# Altium PCB leo_pcb.PcbDoc (part 1 of 2)
Units mm, origin at the board's own origin, x right, y up, seen from the top; angles counter-clockwise.
Board outline 72.5 x 82 mm, 4 copper layers (TOP_Layer, INT1_GND, INT2_GND, BOTTOM_Layer), stack 1.586 mm thick; 90 components, 77 nets, 351 pads, 145 vias.
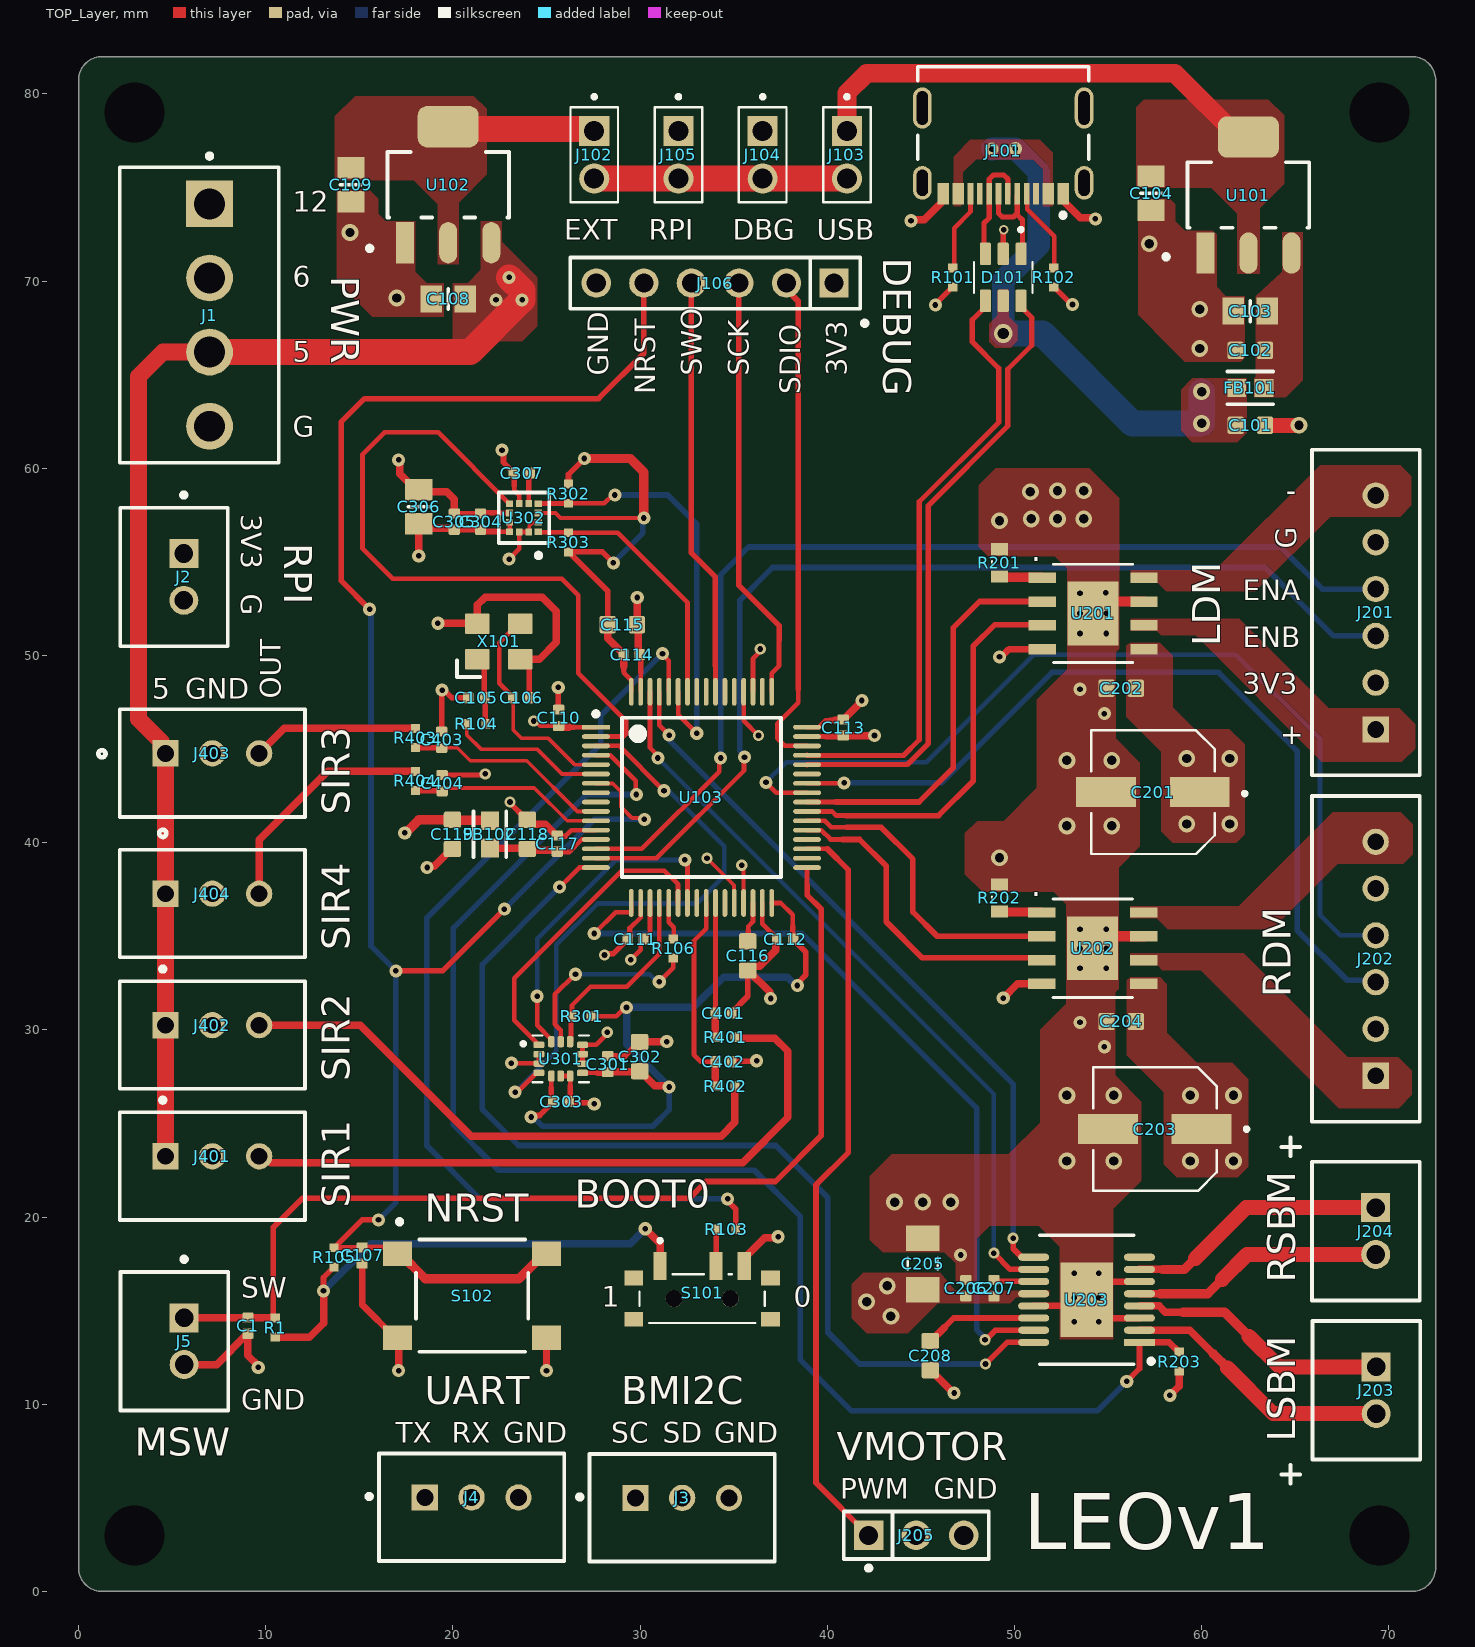
[diagram p0: TOP_Layer view]
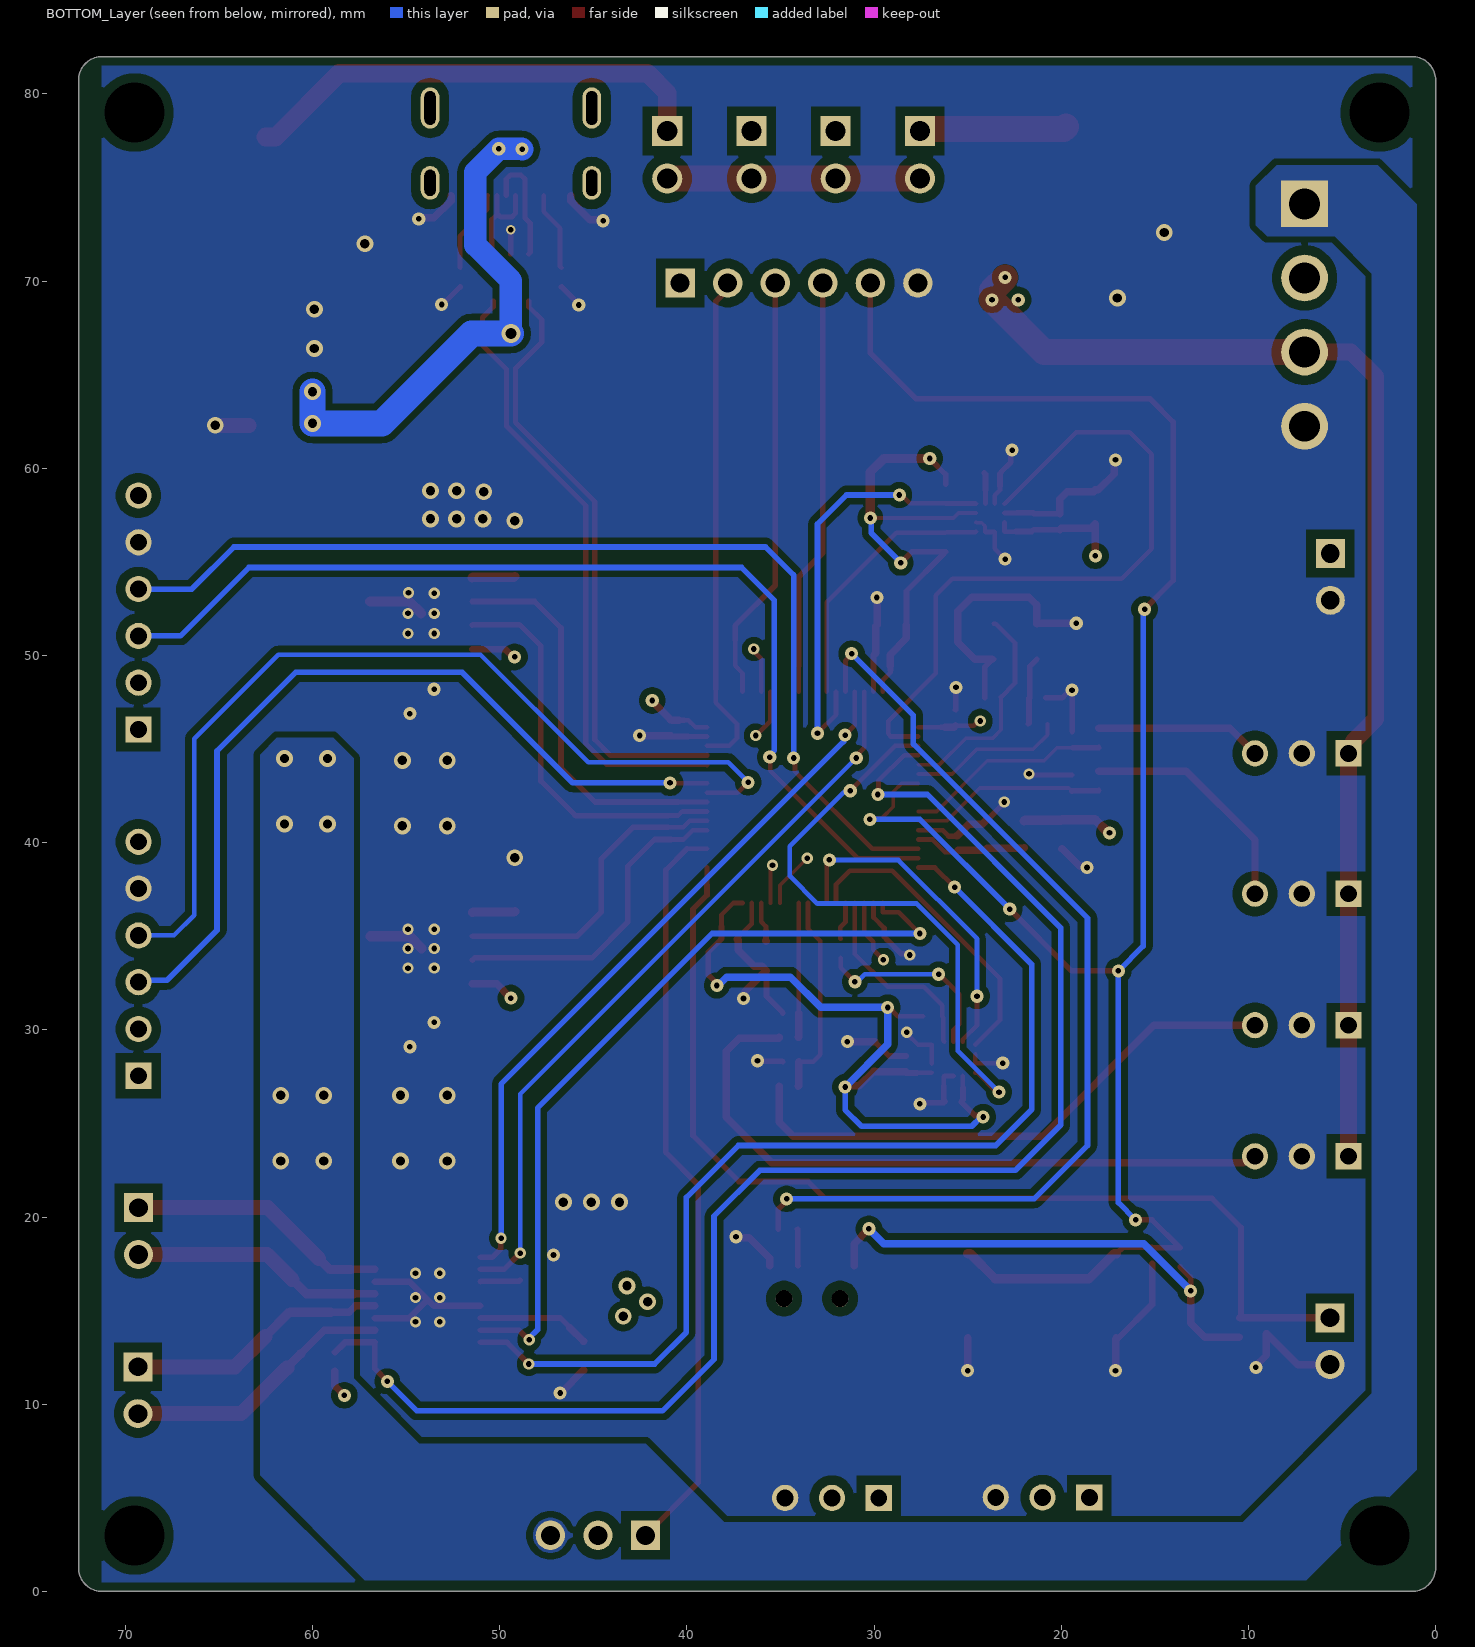
[diagram p1: BOTTOM_Layer view, seen from below]
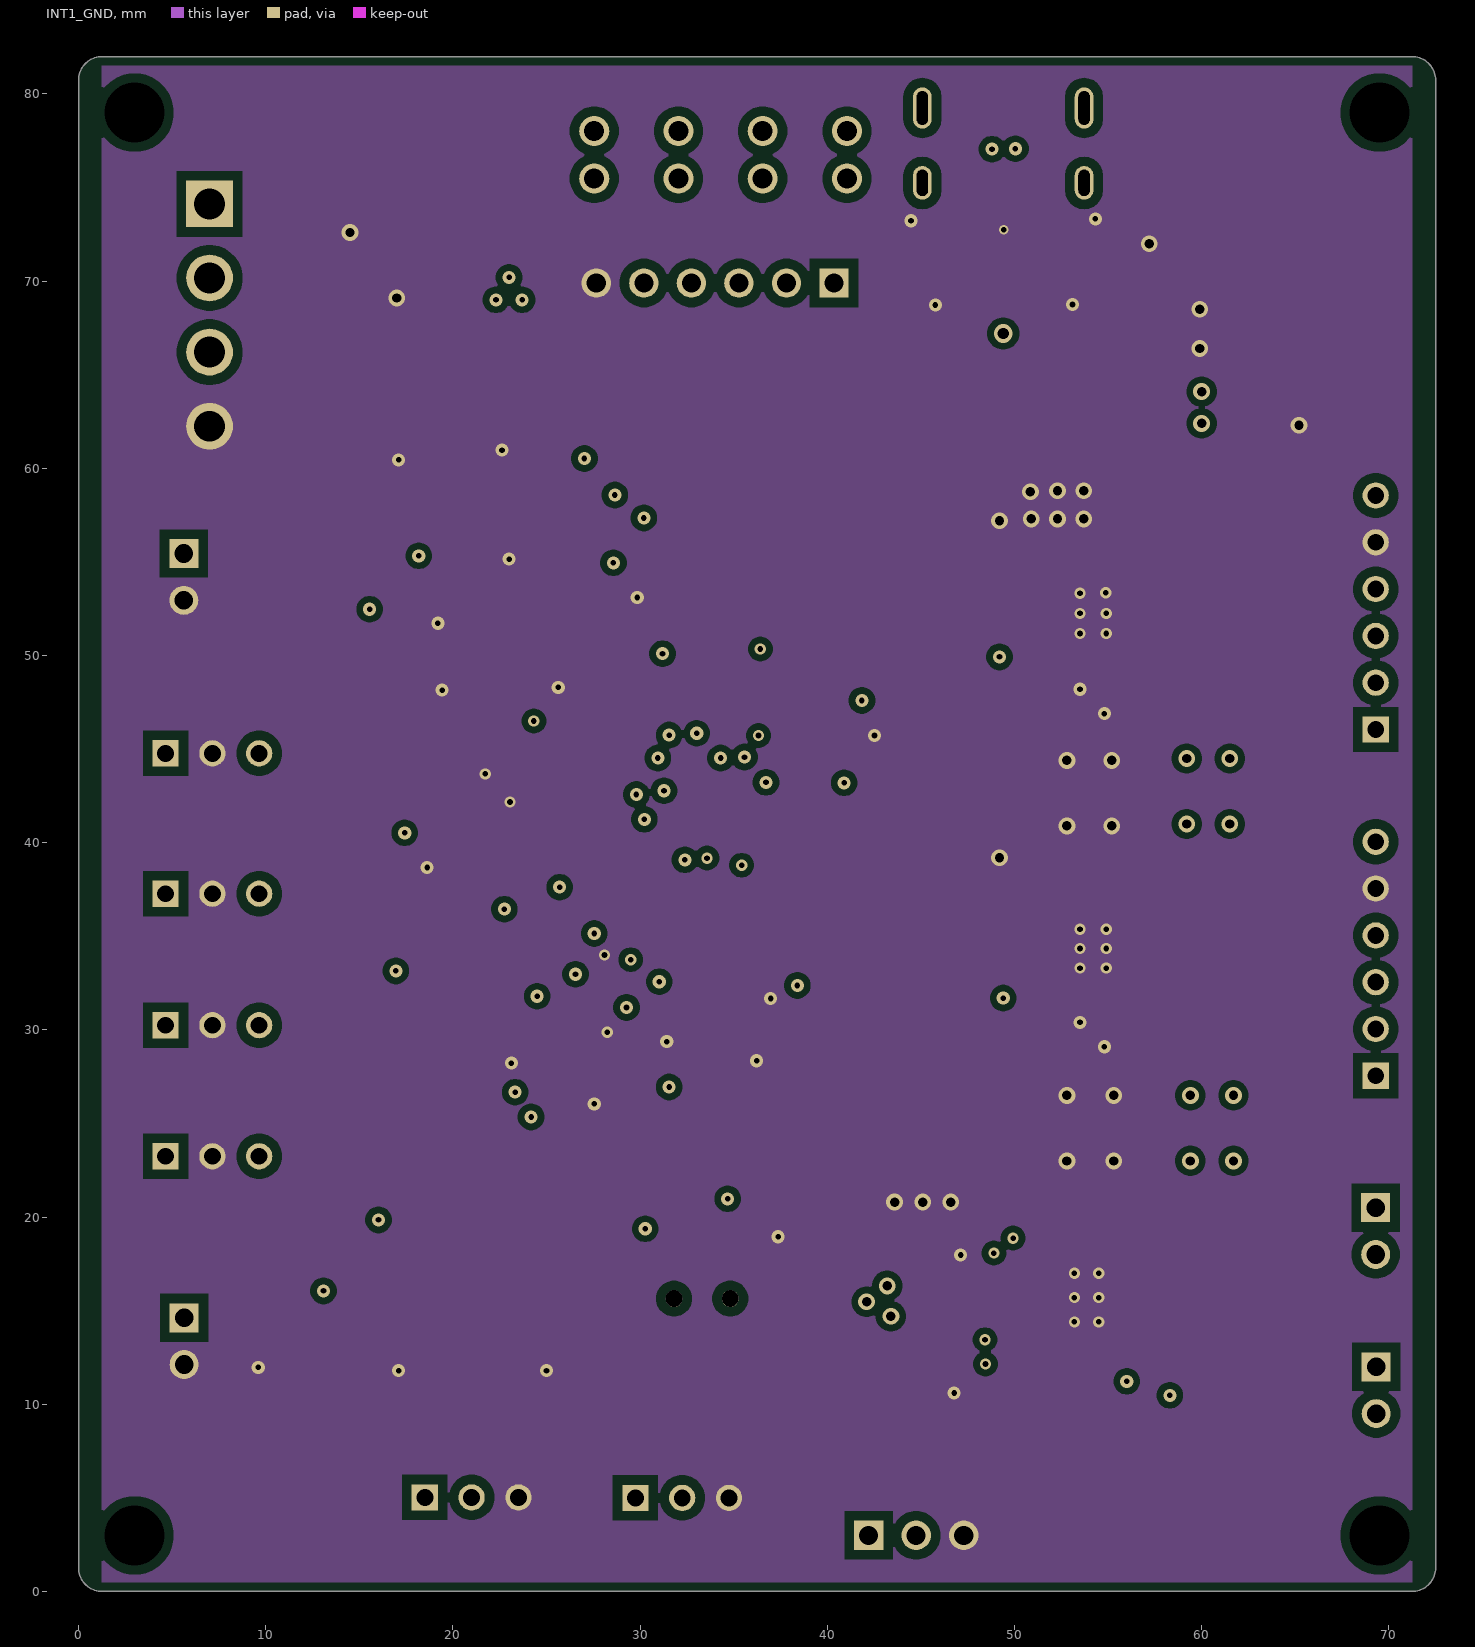
[diagram p2: INT1_GND]
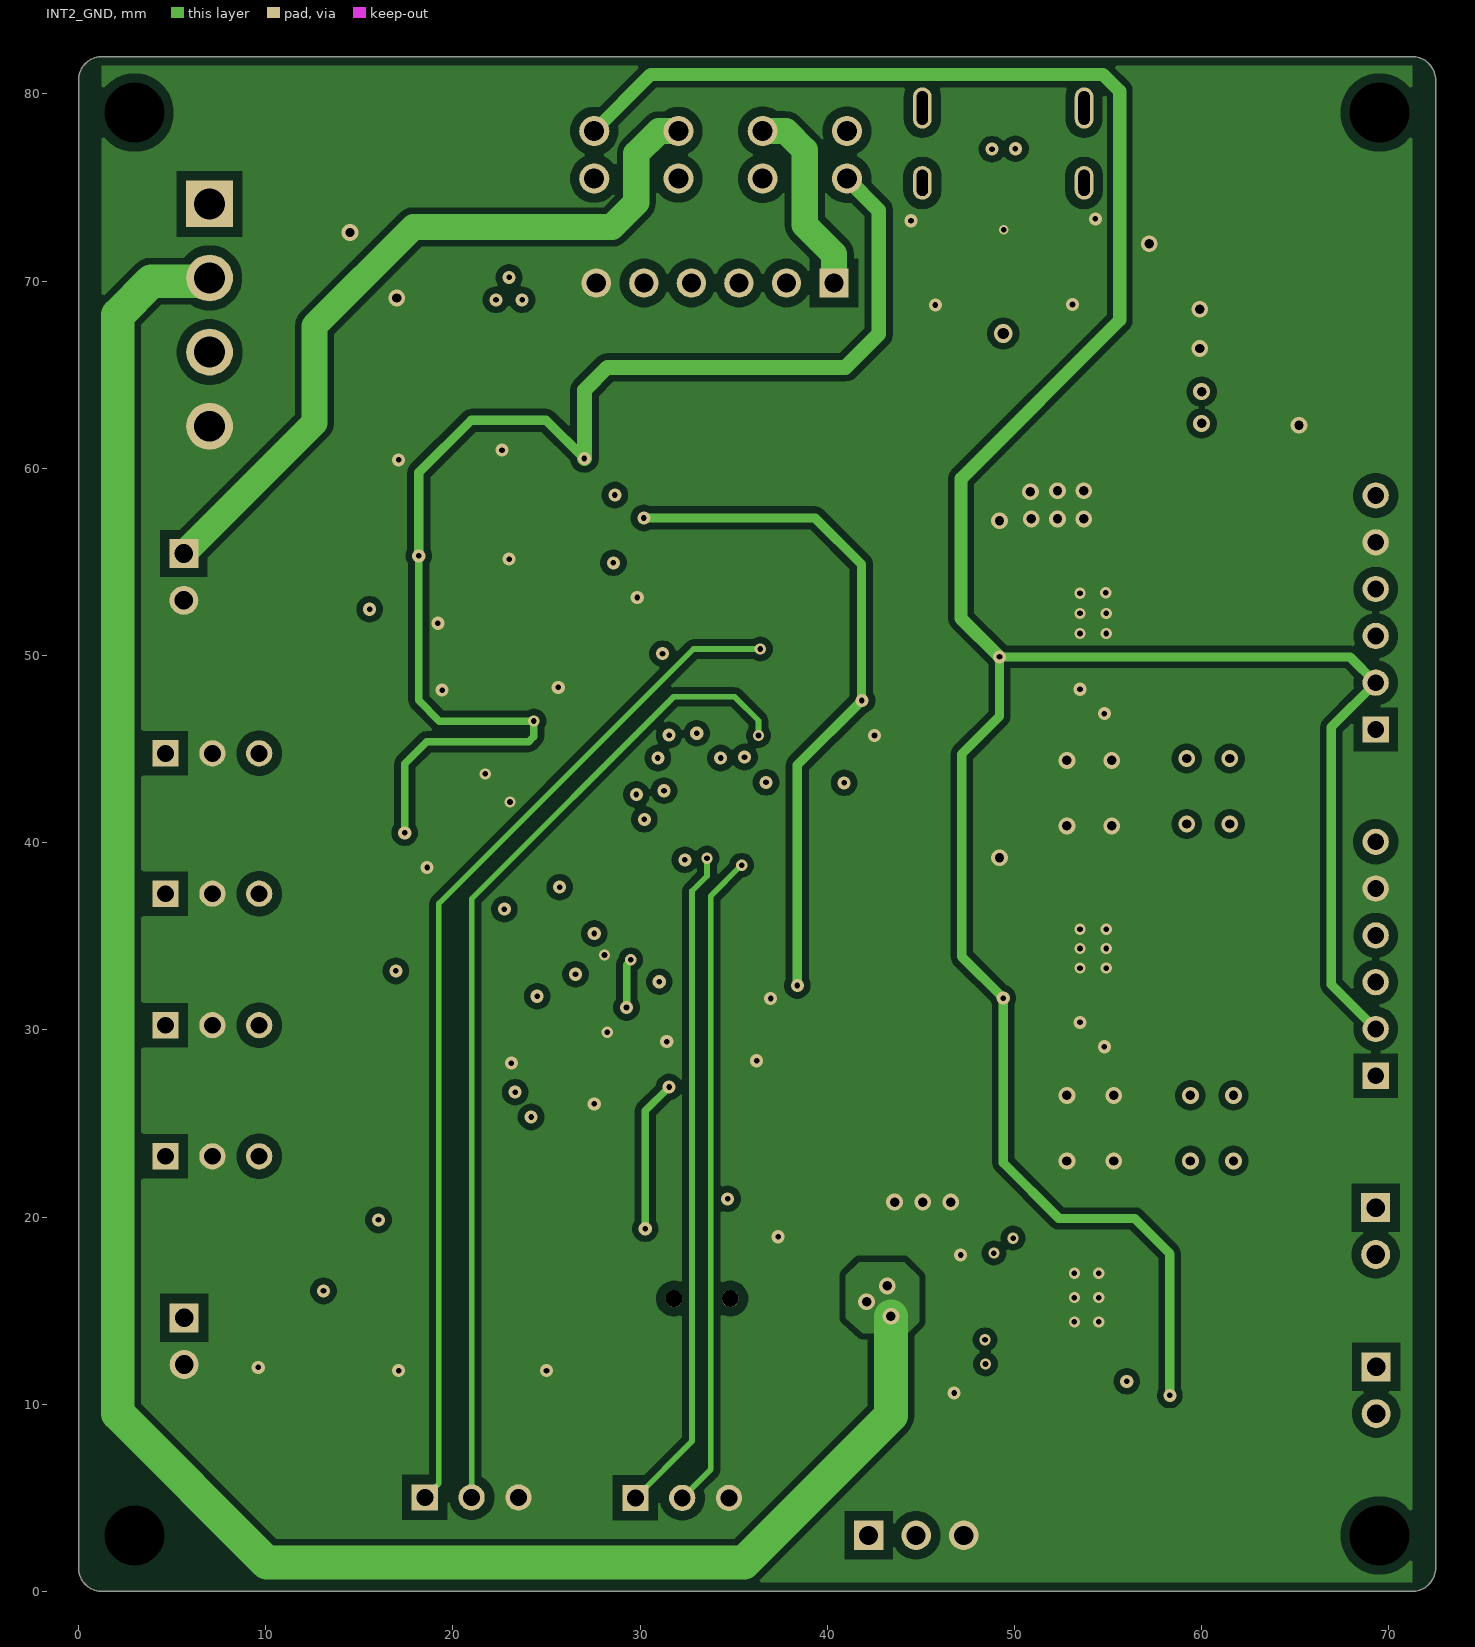
[diagram p3: INT2_GND]
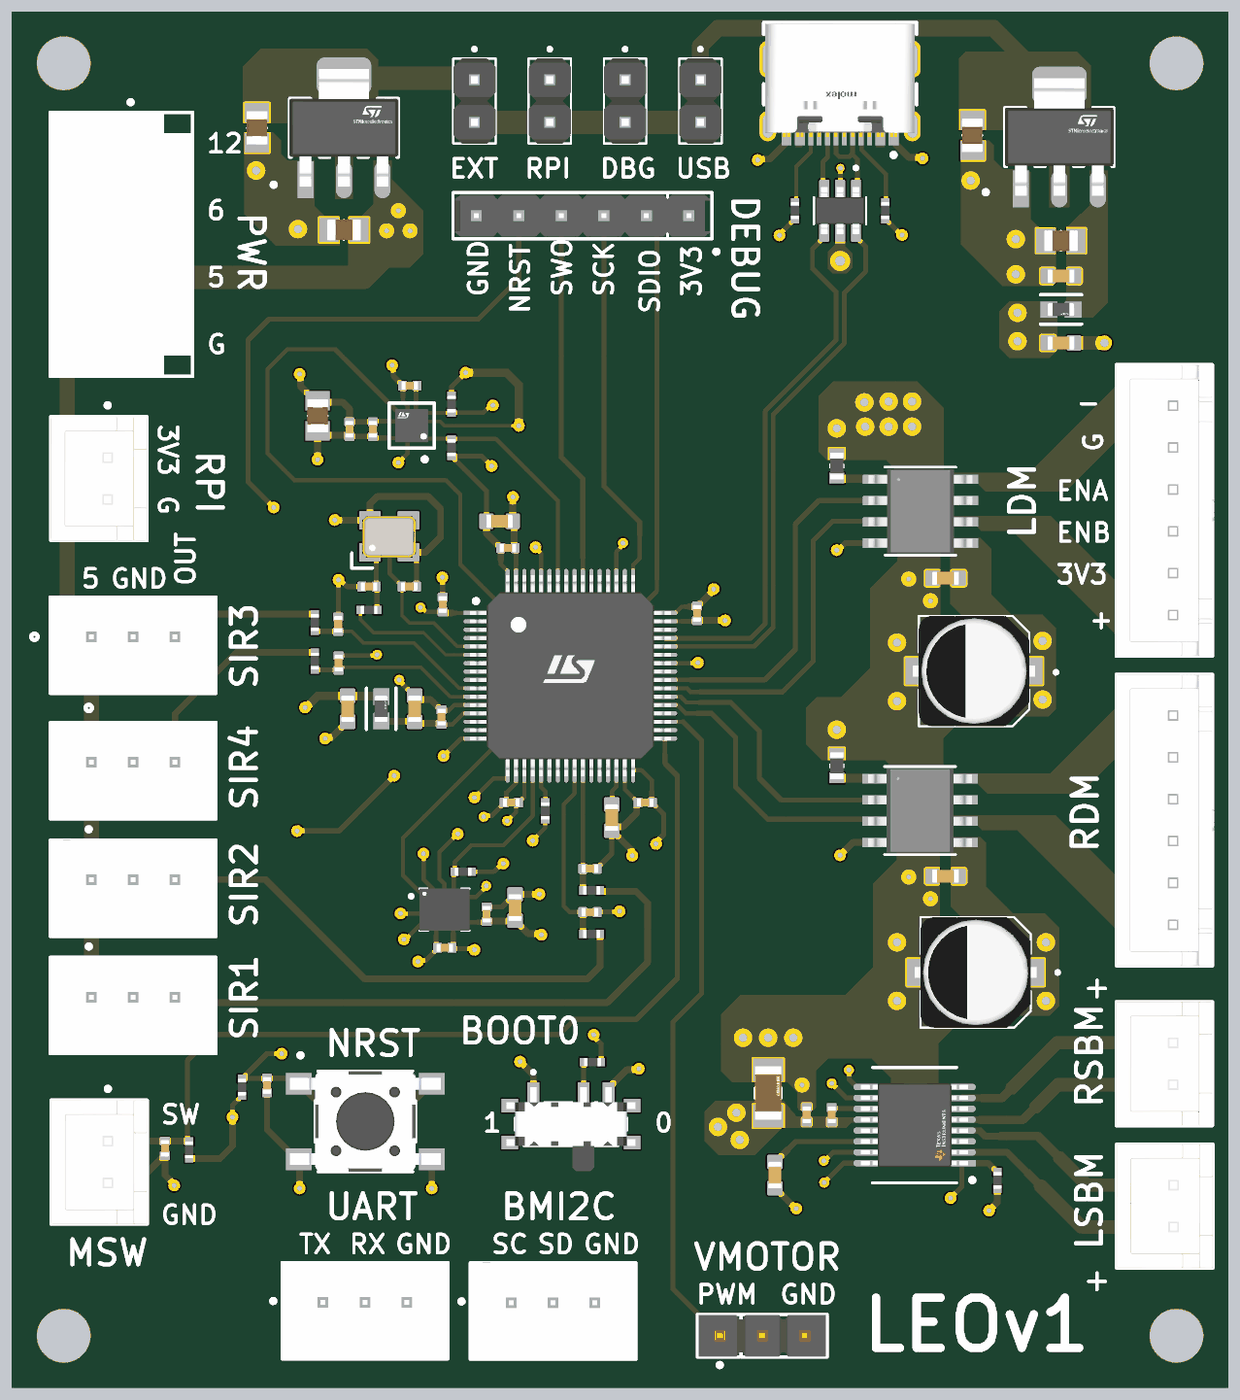
[diagram p5: 3D render of the assembled board from above, using the file's embedded part models]

## Layer stack, top to bottom
Top Solder: solder mask 0.0254, SM-001, Dk 4
TOP_Layer: signal copper 0.035
Dielectric 1: prepreg 0.2104, PP-017, Dk 4.4
INT1_GND: signal copper 0.0152
Dielectric 3: core 1.065, Core-039, Dk 4.6
INT2_GND: signal copper 0.0152
Dielectric 5: prepreg 0.2104, PP-017, Dk 4.4
BOTTOM_Layer: signal copper 0.035
Bottom Solder: solder mask 0.0254, SM-001, Dk 4

## Board outline
1.27,0 cw(c1.27,1.27) 0,1.27 0,80.73 cw(c1.27,80.73) 1.27,82 71.23,82 cw(c71.23,80.73) 72.5,80.73 72.5,1.27 cw(c71.23,1.27) 71.23,0

## Design rules (kind name [scope] priority, off if disabled: settings)
Clearance [All] p1: gap=0.2 ignorepadtopadclearanceinfootprint=FALSE except(0: Arc-Hole Track-Hole SMDPad-Hole THPad-Hole Via-Hole Fill-Hole Poly-Hole Region-Hole Text-Hole; 0.15: SMDPad-SMDPad; 0.25: SMDPad-Via SMDPad-Fill SMDPad-Poly SMDPad-Region; 0.3: SMDPad-THPad THPad-Via; 0.35: Arc-Fill Arc-Poly Arc-Region Track-Fill Track-Poly Track-Region Via-Fill Via-Poly Via-Region Fill-Fill Fill-Poly Fill-Region Poly-Poly Poly-Region Region-Region; 0.5: THPad-THPad THPad-Fill THPad-Poly THPad-Region)
DiffPairsRouting [All] p1: maxlimit=0.254 minlimit=0.203 mostfreqgap=0.254 toplayer_maxgap=0.203 toplayer_prefgap=0.203 toplayer_minwidth=0.281 toplayer_maxwidth=0.281 toplayer_prefwidth=0.281 bottomlayer_maxgap=0.203 bottomlayer_prefgap=0.203 bottomlayer_minwidth=0.281 bottomlayer_maxwidth=0.281 bottomlayer_prefwidth=0.281 impedanceprofiledriven=TRUE impedanceprofileid={2BA723BC-F0D8-4CC2-BE59-BD9791331554} impedanceprofilevalue=90.000000 maxuncoupledlength=12.7
HoleSize [All] p1: absolutevalues=TRUE maxlimit=6.3 minlimit=0.15 maxpercent=80.000 minpercent=20.000
HoleToHoleClearance [All] p1: gap=0.2 allowstackedmicrovias=TRUE
MinimumSolderMaskSliver [All] p1: minsoldermaskwidth=0.13
PlaneClearance [All] p1: clearance=0.5
PolygonConnect [All] p1: connectstyle=Direct reliefconductorwidth=0.254 reliefentries=4 polygonreliefangle="90 Angle" airgapwidth=0.254
RoutingVias [All] p1: holewidth=0.3 width=0.7 viastyle="Through Hole" minholewidth=0.2 minwidth=0.25 maxholewidth=0.7 maxwidth=1.5
SilkToSilkClearance [All] p1: silktosilkclearance=0.25
SilkToSolderMaskClearance [IsPad] p1: minsilkscreentomaskgap=0.2 clearancetoexposedcopper=TRUE
SolderMaskExpansion [All] p1: expansion=0.1 istentingtop=FALSE
UnRoutedNet [All] p1: checkbadconnections=TRUE
Width [All] p1: maxlimit=2 minlimit=0.2 preferedwidth=0.3 midlayer1_maxwidth=1 minimp=50.000000 maximp=50.000000 favimp=50.000000
22 further rules are at their usual default settings.

## Classes and differential pairs
net class SBM_PWM_INPUT[1..4]: SBM_PWM_INPUT1 SBM_PWM_INPUT2 SBM_PWM_INPUT3 SBM_PWM_INPUT4
differential pair class ESD_DIFF_USB: ESD_USB_D
differential pair class DIFF_USB: USB_D
differential pair USB_D: +USB_D_P -USB_D_N
differential pair ESD_USB_D: +ESD_USB_D_P -ESD_USB_D_N

## Components (designator, comment, footprint, x,y, rotation, side; value= is the part's Value field where it differs from the comment)
C1 "100n" CAP_0402 9.05,14.2 r90 top
C101 "2.2u" CAP_0603 62.6,62.3 r180 top
C102 "2.2u" CAP_0603 62.6,66.3 r0 top
C103 "10u" CAP_0805 62.6,68.4 r180 top
C104 "10u" CAP_0805 57.3,74.7 r270 top
C105 "8p" CAP_0402 21.25,47.75 r0 top
C106 "8p" CAP_0402 23.65,47.75 r180 top
C107 "100n" CAP_0402 15.15,17.95 r90 top
C108 "10u" CAP_0805 19.75,69.05 r180 top
C109 "10u" CAP_0805 14.55,75.15 r270 top
C110 "100n" CAP_0402 25.65,46.675 r270 top
C111 "100n" CAP_0402 29.75,34.85 r0 top
C112 "100n" CAP_0402 37.75,34.85 r0 top
C113 "100n" CAP_0402 40.85,46.15 r90 top
C114 "100n" CAP_0402 29.55,50.05 r180 top
C115 "4.7u" CAP_0603 29.05,51.65 r180 top
C116 "2.2u" CAP_0603 35.75,33.95 r90 top
C117 "100n" CAP_0402 25.575,39.95 r270 top
C118 "1u" CAP_0603 23.975,40.45 r270 top
C119 "1u" CAP_0603 19.975,40.45 r90 top
C201 "100u" CAP_EEHZA1E101XP 57.4,42.7 r180 top
C202 "100n" CAP_0603 55.7,48.25 r0 top
C203 "100u" CAP_EEHZA1E101XP 57.5,24.7 r180 top
C204 "100n" CAP_0603 55.7,30.45 r0 top
C205 "22u" CAP_1206 45.1,17.5 r90 top value=22uF
C206 "100n" CAP_0402 47.4,16.2 r270 top
C207 "10n" CAP_0402 48.9,16.2 r270 top
C208 "2.2u" CAP_0603 45.5,12.6 r90 top
C301 "100n" CAP_0402 28.275,28.175 r270 top
C302 "2.2u" CAP_0603 29.975,28.575 r270 top
C303 "10n" CAP_0402 25.775,26.175 r180 top
C304 "100n" CAP_0402 21.475,57.15 r270 top
C305 "100n" CAP_0402 20.075,57.15 r270 top
C306 "10u" CAP_0805 18.175,57.95 r90 top
C307 "220n" CAP_0402 23.675,59.75 r0 top
C401 "100n" CAP_0402 34.45,30.9 r180 top
C402 "100n" CAP_0402 34.45,28.3 r180 top
C403 "100n" CAP_0402 19.4,45.5 r270 top
C404 "100n" CAP_0402 19.425,43.182 r270 top
D101 "USBLC6-2SC6" SOT95P280X145-6N 49.4,70.2 r270 top
FB101 "120R" FP-MPZ1608-0_8-IPC_B 62.6,64.3 r0 top
FB102 "220R" FP-MPZ1608-0_8-IPC_B 21.975,40.45 r90 top
J1 "B4P-VH-B(LF)(SN)" FP-B4P-VH-B_LF_SN-MFG 6.45,68.19 r270 top
J2 "B2B-XH-A(LF)(SN)" FP-B2B-XH-A_LF_SN-MFG 5.1,54.2 r270 top
J3 "B3B-XH-A(LF)(SN)" FP-B3B-XH-A_LF_SN-MFG 32.25,4.475 r0 top
J4 "B3B-XH-A(LF)(SN)" FP-B3B-XH-A_LF_SN-MFG 21,4.5 r0 top
J5 "B2B-XH-A(LF)(SN)" FP-B2B-XH-A_LF_SN-MFG 5.117,13.371 r270 top
J101 "217179-0001" "FP-2171790001-MFG USB-C 2.0" 49.4,78.1 r180 top
J102 "2P_HEADER" "HARWIN_M20-9990246 2P Header" 27.55,76.75 r270 top
J103 "2P_HEADER" "HARWIN_M20-9990246 2P Header" 41.05,76.75 r270 top
J104 "2P_HEADER" "HARWIN_M20-9990246 2P Header" 36.55,76.75 r270 top
J105 "2P_HEADER" "HARWIN_M20-9990246 2P Header" 32.05,76.75 r270 top
J106 "22-28-4060" FP-22-28-4060-MFG 34.01,69.9 r180 top
J201 "B6B-XH-A(LF)(SN)" FP-B6B-XH-A_LF_SN-MFG 68.775,52.3 r90 top
J202 "B6B-XH-A(LF)(SN)" FP-B6B-XH-A_LF_SN-MFG 68.775,33.8 r90 top
J203 "B2B-XH-A(LF)(SN)" FP-B2B-XH-A_LF_SN-MFG 68.8,10.75 r270 top
J204 "B2B-XH-A(LF)(SN)" FP-B2B-XH-A_LF_SN-MFG 68.775,19.25 r270 top
J205 "HTSW-103-07-F-S" FP-HTSW-103-07-F-S-MFG 44.75,3 r0 top
J401 "B3B-XH-A(LF)(SN)" FP-B3B-XH-A_LF_SN-MFG 7.15,22.725 r0 top
J402 "B3B-XH-A(LF)(SN)" FP-B3B-XH-A_LF_SN-MFG 7.15,29.725 r0 top
J403 "B3B-XH-A(LF)(SN)" FP-B3B-XH-A_LF_SN-MFG 7.15,44.25 r0 top
J404 "B3B-XH-A(LF)(SN)" FP-B3B-XH-A_LF_SN-MFG 7.15,36.75 r0 top
R1 "10K" RES_0402 10.5,14.1 r270 top
R101 "5.1K" RES_0402 46.7,70.2 r270 top
R102 "5.1K" RES_0402 52.1,70.2 r270 top
R103 "10K" RES_0402 34.6,19.35 r0 top
R104 "0R" RES_0402 21.25,46.35 r180 top
R105 "10K" RES_0402 13.65,17.85 r270 top
R106 "0R" RES_0402 31.775,34.35 r270 top
R201 "1.5K" RES_0603 49.2,54.95 r270 top
R202 "1.5K" RES_0603 49.2,37.05 r270 top
R203 "0R" RES_0402 58.8,12.275 r270 top
R301 "30K" RES_0402 26.875,30.725 r0 top
R302 "5.1K" RES_0402 26.175,58.65 r90 top
R303 "5.1K" RES_0402 26.175,56.05 r270 top
R401 "2K" RES_0402 34.55,29.6 r180 top
R402 "2K" RES_0402 34.55,27 r180 top
R403 "2K" RES_0402 18,45.6 r270 top
R404 "2K" RES_0402 18,43.3 r270 top
S101 "SSSS811101" SW_SSSS811101 33.315,15.643 r0 top
S102 "SW1" FP-PTS645SM43SMTR92LFS-MFG 21.025,15.8 r0 top
U101 "LDL1117S33R" FP-SOT223-0046067-IPC_A 62.5,74.6 r90 top
U102 "LDL1117S33R" FP-SOT223-0046067-IPC_A 19.75,75.15 r90 top
U103 "STM32F722RET6" FP-LQFP64-5W-IPC_B 33.28,42.422 r0 top locked
U201 "DRV8251ADDAR" SOIC8_DDA_TEX 54.2,52.25 r0 top
U202 "DRV8251ADDAR" SOIC8_DDA_TEX 54.178,34.368 r0 top
U203 "DRV8833PWPR" FP-PWP0016C-IPC_B 53.853,15.582 r180 top
U301 "ICM-42688-P" PQFN50P300X250X97-14N 25.759,28.453 r0 top locked
U302 "IIS2MDCTR" FP-LGA-12-DM00170568-MFG 23.797,57.364 r180 top
X101 "24MHz" XTAL_3225 22.45,50.75 r0 top

## Footprints (in the part's own frame and the unit in brackets; to place one, negate y for a bottom-side part, rotate by r counter-clockwise, add the part's x,y. Pads: shape width x height; smd on the part's side, far side on the other; paste and mask are expansions set on the pad)
CAP_0402 [mm] "100nF ±10% 16V Ceramic Capacitor X7R 0402"
  rrect25% 0.54x0.6 smd mask+0.05: 1(-0.432,0) 2(0.432,0)
  body extent -0.5,-0.25 0.5,0.25, height 0.55
CAP_0603 [mm] "Ceramic Capacitor X5R 0603"
  rrect25% 0.87x0.93 smd: 1(-0.78,0) 2(0.78,0)
  body extent -0.8,-0.4 0.8,0.4, height 0.9
CAP_0805 [mm] "10uF 16V 805"
  rect 1.15x1.45 smd: 1(-0.9,0) 2(0.9,0)
  silkscreen extent 0,-0.55 0,0.55, body extent -1,-0.63 1,0.63, height 1.35
CAP_1206 [mm] "22uF ±10% 25V Ceramic Capacitor X5R 1206"
  rect 1.354x1.806 smd: 1(-1.376,0) 2(1.376,0)
  silkscreen extent -0.32,-0.8 0.32,0.8, body extent -1.6,-0.8 1.6,0.8, height 1.8
CAP_EEHZA1E101XP [mm] "CAP ALUM HYBRID 100uF ±20% 25V SMD"
  rect 3.2x1.6 smd: 1(-2.5,0) 2(2.5,0)
  silkscreen extent -5,-3.3 3.3,3.3, body extent -3.65,-3.3 3.65,3.3, height 7.7
FP-22-28-4060-MFG [mm] "Connector Header Through Hole 6 position 0.100\" (2.54mm)"
  rect 1.57x1.57 hole 1.02 paste-1000 mask+0: 1(-6.35,0)
  round 1.57 hole 1.02 paste-1000 mask+0: 2(-3.81,0) 3(-1.27,0) 4(1.27,0) 5(3.81,0) 6(6.35,0)
  silkscreen extent -8.12,-1.37 7.75,2.27, body extent -7.85,-1.47 7.85,1.47, height 0.25
"FP-2171790001-MFG USB-C 2.0" [mm] "USB 2.0 5A 1 16P -40?~+85? SMD USB, DVI, HDMI Connector Assemblies RoHS"
  rect 0.6x1.15 smd paste+0 mask+0: A1B12(-3.2,3.425) A4B9(-2.4,3.425) B1A12(3.2,3.425) B4A9(2.4,3.425)
  rect 0.3x1.15 smd paste+0 mask+0: A5(-1.25,3.425) A6(-0.25,3.425) A7(0.25,3.425) A8(1.25,3.425) B5(1.75,3.425) B6(0.75,3.425) B7(-0.75,3.425) B8(-1.75,3.425)
  rrect100% 1x1.8 hole 1.4 slot 0.6 at 0 deg paste-2539.97 mask+0: S1(-4.32,2.85) S2(4.32,2.85)
  rrect100% 1x2.2 hole 1.8 slot 0.6 at 0 deg paste-2539.97 mask+0: S3(-4.32,-1.15) S4(4.32,-1.15)
  silkscreen extent -4.57,-3.35 4.57,4.7, body extent -4.92,-3.45 4.92,4.1, height 0.25
FP-B2B-XH-A_LF_SN-MFG [mm] "CONN HEADER TH 6POS 2.5mm"
  rect 1.55x1.55 hole 1 paste-1000 mask+0: 1(-1.25,0.525)
  round 1.55 hole 1 paste-1000 mask+0: 2(1.25,0.525)
  silkscreen extent -4.5,-2.88 3.7,2.88, body extent -3.8,-2.98 3.8,2.98, height 0.25
FP-B3B-XH-A_LF_SN-MFG [mm] "Connector Header 3 position 2.5mm Pitch 3A Through Hole -25?~+85?"
  rect 1.4x1.4 hole 0.9 paste-1000 mask+0: 1(-2.5,0.525)
  round 1.4 hole 0.9 paste-1000 mask+0: 2(0,0.525) 3(2.5,0.525)
  silkscreen extent -5.6,-2.88 4.95,2.88, body extent -5.05,-2.98 5.05,2.98, height 0.25
FP-B4P-VH-B_LF_SN-MFG [mm] "CONN HEADER TH 4POS 3.96mm"
  rect 2.5x2.5 hole 1.65 paste-1000 mask+0: 1(-5.94,0.55)
  round 2.5 hole 1.65 paste-1000 mask+0: 2(-1.98,0.55) 3(1.98,0.55) 4(5.94,0.55)
  silkscreen extent -8.61,-4.25 7.89,4.25, body extent -7.99,-4.35 7.99,4.35, height 0.25
FP-B6B-XH-A_LF_SN-MFG [mm] "Connector Header 6 position 2.5mm Pitch 3A Through Hole -25?~+85?"
  rect 1.4x1.4 hole 0.9 paste-1000 mask+0: 1(-6.25,-0.525)
  round 1.4 hole 0.9 paste-1000 mask+0: 2(-3.75,-0.525) 3(-1.25,-0.525) 4(1.25,-0.525) 5(3.75,-0.525) 6(6.25,-0.525)
  silkscreen extent -8.7,-2.88 8.7,2.88, body extent -8.8,-2.98 8.8,2.98, height 0.25
FP-HTSW-103-07-F-S-MFG [mm] "CONN HEADER VERT 3POS 2.54MM"
  rect 1.57x1.57 hole 1.02 paste-1000 mask+0: 1(-2.54,0)
  round 1.57 hole 1.02 paste-1000 mask+0: 2(0,0) 3(2.54,0)
  silkscreen extent -3.88,-1.87 3.88,1.27, body extent -3.98,-1.37 3.98,1.37, height 0.25
FP-LGA-12-DM00170568-MFG [mm] "IIS2MDCTR"
  rect 0.375x0.35 smd paste-1000 mask+0.01: 1(-0.763,0.75) 2(-0.763,0.25) 3(-0.763,-0.25) 4(-0.763,-0.75) 7(0.763,-0.75) 8(0.763,-0.25) 9(0.763,0.25) 10(0.763,0.75)
  rect 0.35x0.375 smd paste-1000 mask+0.01: 5(-0.25,-0.763) 6(0.25,-0.763) 11(0.25,0.763) 12(-0.25,0.763)
  silkscreen extent -1.35,-1.35 1.35,2.14, body extent -1.55,-1.55 1.55,1.55, height 0.25
FP-LQFP64-5W-IPC_B [mm]
  rect 1.488x0.252 smd paste+0 mask+0: 1(-5.641,3.75)
  rrect100% 1.488x0.252 smd paste+0 mask+0.03: 2(-5.641,3.25) 3(-5.641,2.75) 4(-5.641,2.25) 5(-5.641,1.75) 6(-5.641,1.25) 7(-5.641,0.75) 8(-5.641,0.25) 9(-5.641,-0.25) 10(-5.641,-0.75) 11(-5.641,-1.25) 12(-5.641,-1.75) 13(-5.641,-2.25) 14(-5.641,-2.75) 15(-5.641,-3.25) 16(-5.641,-3.75) 33(5.641,-3.75) 34(5.641,-3.25) 35(5.641,-2.75) 36(5.641,-2.25) 37(5.641,-1.75) 38(5.641,-1.25) 39(5.641,-0.75) 40(5.641,-0.25) 41(5.641,0.25) 42(5.641,0.75) 43(5.641,1.25) 44(5.641,1.75) 45(5.641,2.25) 46(5.641,2.75) 47(5.641,3.25) 48(5.641,3.75)
  rrect100% 0.252x1.488 smd paste+0 mask+0.03: 17(-3.75,-5.641) 18(-3.25,-5.641) 19(-2.75,-5.641) 20(-2.25,-5.641) 21(-1.75,-5.641) 22(-1.25,-5.641) 23(-0.75,-5.641) 24(-0.25,-5.641) 25(0.25,-5.641) 26(0.75,-5.641) 27(1.25,-5.641) 28(1.75,-5.641) 29(2.25,-5.641) 30(2.75,-5.641) 31(3.25,-5.641) 32(3.75,-5.641) 49(3.75,5.641) 50(3.25,5.641) 51(2.75,5.641) 52(2.25,5.641) 53(1.75,5.641) 54(1.25,5.641) 55(0.75,5.641) 56(0.25,5.641) 57(-0.25,5.641) 58(-0.75,5.641) 59(-1.25,5.641) 60(-1.75,5.641) 61(-2.25,5.641) 62(-2.75,5.641) 63(-3.25,5.641) 64(-3.75,5.641)
  silkscreen extent -5.77,-4.25 4.25,4.58, body extent -6.64,-6.64 6.64,6.64, height 0.25
FP-MPZ1608-0_8-IPC_B [mm] "220O@100MHz 1 Line Ferrite Bead 0603 2.2A 50mO"
  rect 1.006x0.958 smd paste+0 mask+0: 1(-0.726,0) 2(0.726,0)
  silkscreen extent -1.23,-0.88 1.23,0.88, body extent -1.48,-0.73 1.48,0.73, height 0.25
FP-PTS645SM43SMTR92LFS-MFG [mm]
  rect 1.55x1.3 smd paste+0 mask+0: 1(-3.975,2.25) 2(3.975,2.25) 3(-3.975,-2.25) 4(3.975,-2.25)
  silkscreen extent -4,-3 3,4.07, body extent -4.5,-3 4.5,3, height 4.3
FP-PWP0016C-IPC_B [mm]
  rect 1.655x0.381 smd paste+0 mask+0: 1(-2.825,2.275)
  rrect100% 1.655x0.381 smd paste+0 mask+0: 2(-2.825,1.625) 3(-2.825,0.975) 4(-2.825,0.325) 5(-2.825,-0.325) 6(-2.825,-0.975) 7(-2.825,-1.625) 8(-2.825,-2.275) 9(2.825,-2.275) 10(2.825,-1.625) 11(2.825,-0.975) 12(2.825,-0.325) 13(2.825,0.325) 14(2.825,0.975) 15(2.825,1.625) 16(2.825,2.275)
  rect 2.8x4 smd paste-1000 mask+0: 17(0,0)
  silkscreen extent -3.57,-3.45 2.5,3.45, body extent -3.9,-2.75 3.9,2.75, height 0.25
FP-SOT223-0046067-IPC_A [mm] "3.3V Positive Fixed SOT-223-4 Voltage Regulators - Linear, Low Drop Out (LDO) Regulators RoHS"
  rect 2.204x0.96 smd paste+0 mask+0: 1(-3.1,2.3)
  rrect100% 2.204x0.96 smd paste+0 mask+0: 2(-3.1,0) 3(-3.1,-2.3)
  rrect44% 2.204x3.26 smd paste+0 mask+0: 4(3.1,0)
  silkscreen extent -3.42,-3.25 1.75,4.52, body extent -4.7,-3.75 4.7,3.75, height 0.25
"HARWIN_M20-9990246 2P Header" [mm] "2P Header 2.54mm"
  rect 1.605x1.605 / inner round 1.605 / far side rect 1.605x1.605 hole 1.07: 1(-1.27,0)
  round 1.605 hole 1.07: 2(1.27,0)
  silkscreen extent -3.2,-1.27 2.54,1.27, body extent -2.54,-1.27 2.54,1.27, height 8.74
PQFN50P300X250X97-14N [mm] "ICM-42688-P"
  rrect50% 0.59x0.35 smd mask+0.01: 1(-1.165,0.75) 2(-1.165,0.25) 3(-1.165,-0.25) 4(-1.165,-0.75) 8(1.165,-0.75) 9(1.165,-0.25) 10(1.165,0.25) 11(1.165,0.75)
  rrect50% 0.35x0.59 smd mask+0.01: 5(-0.5,-0.915) 6(0,-0.915) 7(0.5,-0.915) 12(0.5,0.915) 13(0,0.915) 14(-0.5,0.915)
  silkscreen extent -2.1,-1.25 1.5,1.25, body extent -1.5,-1.25 1.5,1.25, height 0.97
RES_0402 [mm] "0402 Thick Film Resistor AEC-Q200"
  rect 0.475x0.5 smd: 1(-0.512,0) 2(0.512,0)
  body extent -0.5,-0.25 0.5,0.25, height 0.35
RES_0603 [mm] "0603 Thin Film Resistor AEC-Q200"
  rect 0.65x0.9 smd: 1(-0.725,0) 2(0.725,0)
  silkscreen extent -0.08,-0.4 0.08,0.4, body extent -0.8,-0.4 0.8,0.4, height 0.45
SOIC8_DDA_TEX [mil]
  rect 57.5x22 smd paste+0 mask+0: 1(-107.25,75) 2(-107.25,25) 3(-107.25,-25) 4(-107.25,-75) 5(107.25,-75) 6(107.25,-25) 7(107.25,25) 8(107.25,75)
  rect 107x134 smd paste-66.5 mask+0: 9(0,0)
  silkscreen extent -84,-104 84,104, body extent -122,-99 122,99, height 67
SOT95P280X145-6N [mm] "17VC Clamp 5A Ipp ESD DIODE SOT-23-6L"
  rrect25% 1.21x0.59 smd: 1(-1.255,0.95) 2(-1.255,0) 3(-1.255,-0.95) 4(1.255,-0.95) 5(1.255,0) 6(1.255,0.95)
  silkscreen extent -2.65,-1.57 0.81,1.57, body extent -1.4,-1.46 1.4,1.46, height 1.4
SW_SSSS811101 [mm] "Slide Switch SPDT 300mA @ 5V Surface Mount, Right Angle Rectangular Columnar"
  rect 0.7x1.5 smd: 1(-2.25,1.75) 2(0.75,1.75) 3(2.25,1.75)
  rect 1x0.8 smd: SH1(-3.65,1.1) SH2(3.65,1.1) SH3(-3.65,-1.1) SH4(3.65,-1.1)
  round 0.9 hole 0.9 unplated: ""(-1.5,0) ""(1.5,0)
  silkscreen extent -3.35,-1.3 3.35,3.2, body extent -3.85,-2.8 3.85,2.2, height 1.4
XTAL_3225 [mm] "Crystal 24MHz ±10ppm 9pF 40O SMD3225-4P"
  rrect10% 1.3x1.1 smd: 1(-1.15,-0.95) 2(1.15,-0.95) 3(1.15,0.95) 4(-1.15,0.95)
  silkscreen extent -2.23,-1.89 -1,-1, body extent -1.6,-1.28 1.6,1.22, height 0.61

## Part data
C1 C105 C106 C107 C110 C111 C112 C113 C114 C117 C206 C207 C301 C303 C304 C305 C307 C401 C402 C403 C404: library part CAP_0402, "Ceramic Capacitor X7R 0402 (1005 Metric)", Package="SMD-2 Samsung", Check_prices=https://www.snapeda.com/parts/CL05B104KO5NNNC/Samsung/view-part/?ref=eda, MF=Samsung, MP=CL05B104KO5NNNC, SnapEDA_Link=https://www.snapeda.com/parts/CL05B104KO5NNNC/Samsung/view-part/?ref=snap
C101 C102 C115 C116 C118 C119 C202 C204 C208 C302: library part CAP_0603, "Ceramic Capacitor X5R 0603 (1608 Metric)", Package="SMD-2 Samsung", Check_prices=https://www.snapeda.com/parts/CL10A475KO8NNNC/Samsung/view-part/?ref=eda, MF="Samsung Electro-Mechanics", MP=CL10A475KO8NNNC, SnapEDA_Link=https://www.snapeda.com/parts/CL10A475KO8NNNC/Samsung/view-part/?ref=snap
C103 C104 C108 C109 C306: library part CAP_0805, "Ceramic Capacitor X7R 0805 (2012 Metric)", Package="0805 Samsung", Check_prices=https://www.snapeda.com/parts/CL21B106KOQNNNE/Samsung+Electro-Mechanics/view-part/?ref=eda, MF="Samsung Electro-Mechanics", MP=CL21B106KOQNNNE, SnapEDA_Link=https://www.snapeda.com/parts/CL21B106KOQNNNE/Samsung+Electro-Mechanics/view-part/?ref=snap
C201 C203: library part EEHZA1E101XP, "100F 25V Aluminum - Polymer Capacitors Radial, Can - SMD 30mOhm 10000 Hrs @ 105C", Package="RADIAL-2 Panasonic", Availability="In Stock", Check_prices=https://www.snapeda.com/parts/EEHZA1E101XP/Panasonic/view-part/?ref=eda, MF=Panasonic, MP=EEHZA1E101XP, Price=None, Purchase-URL=https://pricing.snapeda.com/search/part/EEHZA1E101XP/?ref=eda, SnapEDA_Link=https://www.snapeda.com/parts/EEHZA1E101XP/Panasonic/view-part/?ref=snap
C205: library part CAP_1206, "Ceramic Capacitor, Multilayer, Ceramic, 25V, 10% +Tol, 10% -Tol, X5R, 15% TC, 22uF, Surface Mount, 1206", Capacitance=22uF, Case/Package=1206, Dielectric=X5R, Digikey Part Number=1276-3047-1-ND, Manufacturer=Samsung, Max Operating Temperature=85°C, Min Operating Temperature=-55°C, Mouser Part Number=187-CL31A226KAHNNNE, Package=CL31H-0.2, Part Number=CL31A226KAHNNNE, Temperature="-55°C to +85°C", Temperature Coefficient=15%, Temperature Range High=+85°C, Tolerance=10%, Voltage Rating=25V, Automotive=No, ComponentLink1Description=Upverter, ComponentLink1URL=https://upverter.com/part/id/4e7a76ad8fe2f2e1/, ComponentLink2Description=Datasheet, ComponentLink2URL=https://product.samsungsem.com/mlcc/CL31A226KAHNNN.do, Digikey Description="CAP CER 22UF 25V X5R 1206", Height=1.8mm, helpURL=https://upverter.com/part/id/4e7a76ad8fe2f2e1/, Ipc Land Pattern Name=CAPC320160X160, Lead Free=Yes, Material=Ceramic, RoHS=TRUE, Supplier 1=Digi-Key, Supplier 2=Mouser, Supplier Part Number 1=1276-3047-1-ND, Supplier Part Number 2=187-CL31A226KAHNNNE, Symbol Hash=fb88589c83559698c54462c48d907c3ddae810bd717f4f20b193cecb944ab7ab, Temperature Characteristic=X5R, Temperature Range Low=-55°C, Verification Version=0.0.0.3, Voltage Rating (DC)=25V
D101: "Low-Capacitance ESD Protection USB", Manufacturer=STMicroelectronics, Distributor Link=https://www.mouser.de/ProductDetail/STMicroelectronics/USBLC6-2SC6?qs=po45yt2pPpu%2FhNIlwQdTlg%3D%3D, Manufacturer Part Number=USBLC6-2SC6
FB101: library part Ferrite_Bead_120R_0603, "120Ω@100MHz 1 Line Ferrite Bead 0603 3A 30mΩ", Case Code (Imperial)=0603, Case Code (Metric)=1608, Current Rating=3A, DC Resistance (DCR)=30mR, Inductor Type="FERRITE BEAD", Max Operating Temperature=125°C, Min Operating Temperature=-55°C, Package Quantity=4000, Test Frequency=100MHz, Tolerance=25%, Case/Package=0603, Core Material=Ferrite, Depth=0.95mm, Height=0.8mm, Impedance=120R, Lead Free="Lead Free", Length=1.6mm, Material=Ferrite, Max Current Rating=3A, Max DC Current=3A, Number Of Circuits=1, Number of Lines=1, Number of Pins=2, Packaging="Tape and Reel", REACH SVHC="No SVHC", RoHS Compliant=Yes, Series=BLM18K, Termination=SMD/SMT, Width=0.8mm
FB102: library part Ferrite_Bead_0603, "Power line Ferrite Bead 220Ω @ 100MHz 2.2A DCR 0.05Ω SMD 0603", Case Code (Imperial)=0603, Case Code (Metric)=1608, Current Rating=2.2A, DC Resistance (DCR)=50mR, Package Quantity=1, Tolerance=25%, Case/Package=0603, Core Material=Ferrite, Height=0.037inch, Impedance=220R, Lead Free="Lead Free", Length=0.063inch, Max DC Current=2.2A, Mount="Surface Mount", Number of Pins=2, Packaging="Cut Tape", REACH SVHC="No SVHC", RoHS Compliant=Yes, Series=MPZ, Width=0.031inch
J1: "CONN HEADER VERT 4POS 3.96MM", Flammability Rating="UL94 V-0", Insulation Color=Natural, Voltage Rating=250V, Connector Type=Header, Contact Finish - Mating=TIN, Contact Material=Brass, Contact Shape=Square, Contact Type="Male Pin", Fastening Type=Ramp, Insulation Material=PBT, Lead Free="Lead Free", Mount="Through Hole", Number of Positions=4, Number of Rows=1, Packaging=Bulk, Pitch=3.96mm, Series=VH, Termination=Solder
J2 J5 J203 J204: "CONN HEADER VERT 2POS 2.5MM", Color=Natural, Contact Resistance=20mR, Current Rating=3A, Housing Color=White, Insulation Resistance=1GR, Max Operating Temperature=85°C, Max Voltage Rating (AC)=250V, Min Operating Temperature=-25°C, Connector Type="Male Pin", Contact Material=Brass, Contact Plating=Tin, Contact Type="Male Pin", Depth=5.75mm, Fastening Type=Detent, Housing Material=Polyamide, Lead Free="Lead Free", Lead Pitch=2.5mm, Length=7.4mm, Max Current Rating=3A, Max Voltage Rating (DC)=250V, Mount="Through Hole", Number of Contacts=2, Number of Positions=2, Number of Rows=1, Orientation=Straight, Packaging=Bulk, Pitch=2.5mm, REACH SVHC="No SVHC", Series=XH, Termination=Solder, Voltage Rating=250V, Voltage Rating (AC)=250V, Wire/Cable Gauge=22AWG
J3 J4 J401 J402 J403 J404: "CONN HEADER VERT 3POS 2.5MM", Color=Natural, Contact Resistance=20mR, Current Rating=3A, Flammability Rating="UL94 V-0", Housing Color=White, Insulation Resistance=1GR, Max Operating Temperature=85°C, Max Voltage Rating (AC)=250V, Min Operating Temperature=-25°C, Connector Type=Header, Contact Finish - Mating=TIN, Contact Material=Brass, Contact Plating=Tin, Contact Shape=Square, Contact Type="Male Pin", Depth=5.75mm, Fastening Type=Detent, Gender=Male, Housing Material=Polyamide, Insulation Color=Natural, Insulation Material=Nylon, Lead Free="Lead Free", Lead Pitch=2.5mm, Length=9.9mm, Max Current Rating=3A, Max Voltage Rating (DC)=250V, Mount="Through Hole", Number of Contacts=3, Number of Positions=3, Number of Rows=1, Orientation=Straight, Packaging=Bulk, Pitch=2.5mm, REACH SVHC="No SVHC", Series=XH, Termination=Solder, Voltage Rating=250V, Voltage Rating (AC)=250V, Wire/Cable Gauge=22AWG
J101: library part USB_Connector, "USB 2.0 5A 1 16P -40℃~+85℃ SMD USB, DVI, HDMI Connector Assemblies RoHS", LCSC Part Number=C3197684, Manufacturer=Molex, Supplier Part Number=900-2171790001CT-ND, Category=Connectors, Manufacturer Part Number=217179-0001, Pricing="1=0.9, 10=0.745, 100=0.6212 (USD)", RoHS=No, Stock=7228, Supplier=Digikey
J102 J103 J104 J105: "2.54mm (0.1) Pitch SIL Vertical Throughboard Pin Header, 6.1mm mating pin height, tin, 2 contacts", Package=None, Check_prices=https://www.snapeda.com/parts/M20-9990246/Harwin/view-part/?ref=eda, MF=Harwin, MP=M20-9990246, SnapEDA_Link=https://www.snapeda.com/parts/M20-9990246/Harwin/view-part/?ref=snap
J106: library part 6P_M_HEADER, "CONN HEADER VERT 6POS 2.54MM", Color=Black, Contact Resistance=20mR, Current Rating=4A, Max Operating Temperature=75°C, Max Voltage Rating (AC)=250V, Max Voltage Rating (DC)=250.25kV, Min Operating Temperature=0°C, Package Quantity=1, Connector Type="Male Pin", Contact Material=Brass, Contact Mating Length=0.24inch, Contact Plating=Tin, Contact Type="Male Pin", Depth=2.49mm, Gender=Male, Housing Color=Black, Housing Material=Thermoplastic, Length=15.24mm, Mount="Through Hole", Number of Contacts=6, Number of Positions=6, Number of Rows=1, Orientation=Straight, Packaging=Bulk, Pitch=2.54mm, RoHS Compliant=Yes, Series="KK® 42375", Termination=Solder, Voltage Rating=250V
J201 J202: "CONN HEADER VERT 6POS 2.5MM"
J205: library part 3P_MHEADER, "CONN HEADER VERT 3POS 2.54MM", Color=Natural, Flammability Rating="UL94 V-0", Max Current Rating=7.6A, Max Operating Temperature=125°C, Max Voltage Rating (AC)=550V, Min Operating Temperature=-55°C, Connector Type=Header, Contact Finish - Mating=GOLD, Contact Material=Bronze, Contact Mating Length=0.23inch, Contact Plating=Gold, Contact Shape=Square, Contact Type="Male Pin", Depth=2.48mm, Fastening Type=Pull, Gender=Male, Housing Color=Natural, Housing Material=Polymer, Insulation Color=Natural, Insulation Material=Polymer, Length=7.62mm, Mount="Through Hole", Number of Contacts=3, Number of Positions=3, Number of Rows=1, Orientation=Straight, Packaging=Bulk, Pitch=2.54mm, Radiation Hardening=No, REACH SVHC="No SVHC", RoHS Compliant=Yes, Series=HTSW, Termination=Solder
R1 R101 R102 R103 R104 R105 R106 R203 R301 R302 R303 R401 R402 R403 R404: library part RES_0402, "Chip Resistor 0402 (1005 Metric) Automotive AEC-Q200 Thick Film", Package="1005-2 Panasonic", Availability="In Stock", Check_prices=https://www.snapeda.com/parts/ERJ-2RKF1002X/Panasonic%20Electronic%20Components/view-part/78636/?ref=eda, MF=Panasonic, MP=ERJ-2RKF1002X, Price=None, SnapEDA_Link=https://www.snapeda.com/parts/ERJ-2RKF1002X/Panasonic%20Electronic%20Components/view-part/78636/?ref=snap
R201 R202: library part RES_0603, "0603 Thin Film Resistor AEC-Q200", Package=None, Availability=Unavailable, MP=ERA3VEB1501V, Price=None
S101: "Switch Slide SP Side Slide 0.3A 5VDC 10000Cycles Gull Wing SMD T/R", Package=None, Check_prices=https://www.snapeda.com/parts/SSSS811101/ALPS/view-part/?ref=eda, MF=ALPS, MP=SSSS811101, SnapEDA_Link=https://www.snapeda.com/parts/SSSS811101/ALPS/view-part/?ref=snap
S102: library part PTS645SM43SMTR92LFS, "Tactile Switch SPST 160gf 4.3mm Gull Wing 6mm x 6mm Surface Mount", Case/Package=SMD/SMT, Color=Black, Contact Resistance=100mR, Current Rating=50mA, Max Operating Temperature=60°C, Max Voltage Rating (DC)=12V, Min Operating Temperature=-20°C, Operating Force=160gf, Package Quantity=1, Actuator Length=0.85mm, Actuator Material=Nylon, Actuator Type=Standard, Contact Material=Silver, Contact Plating=Silver, Depth=9mm, Illumination Type=Non-Illuminated, Lead Free="Lead Free", Length=6mm, Max Current Rating=50mA, Mechanical Life=100000Cycles, Mount="Surface Mount", Orientation=Straight, Packaging="Tape and Reel", REACH SVHC="No SVHC", Switch Function=Off-Mom, Termination="Gull Wing", Throw Configuration=SPST, Voltage Rating (DC)=12V
U101 U102: library part LDO_LDL1117S33R, "IC REG LINEAR 3.3V 1.2A SOT223", Dropout Voltage=350mV, Manufacturer=STMicroelectronics, Max Junction Temp=+125°C, Max Supply Voltage=18V, Min Supply Voltage=2.6V, Nominal Supply Current=250uA, Output Current=2A, Output Voltage=3.3V, Package=SOT223-0046067, Temperature="-40°C to +125°C", Temperature Range Low=-40°C, Accuracy Percentage=2%, Automotive=No, Category=IC, ComponentLink2Description=Datasheet, ComponentLink2URL=https://www.st.com/resource/en/datasheet/ldl1117.pdf, Device Class L1="Integrated Circuits (ICs)", Device Class L2="Power Management ICs", Device Class L3="Voltage Regulators - Linear", Digikey Description="IC REG LINEAR 3.3V 1.2A SOT223", Height=1.9mm, Ipc Land Pattern Name=SOT230P700X190-4, Lead Free=Yes, Manufacturer Part Number=LDL1117S33R, Mouser Description="LDL1117 Series 1.2 A 3.3 V High PSRR LDO Linear Voltage Regulator-SOT-223", Number Of Outputs=1, Octopart=https://octopart.com/ldl1117s33r-stmicroelectronics-81876163, Output Type=Fixed, RoHS=TRUE, Standoff Height=0.02mm, Temperature Range High=+125°C
U103: "ARM Cortex-M7 32 Bit 216MHz 50 LQFP-64(10x10) Microcontrollers RoHS", Package="LQFP-64 STMicroelectronics", Check_prices=https://www.snapeda.com/parts/STM32F722RET6/STMicroelectronics/view-part/?ref=eda, MF=STMicroelectronics, MP=STM32F722RET6, SnapEDA_Link=https://www.snapeda.com/parts/STM32F722RET6/STMicroelectronics/view-part/?ref=snap
U201 U202: "50-V, 4.1-A H-bridge motor driver with integrated current regulation & current-sense feedback 8-SO PowerPAD -40 to 150", Manufacturer_Name="Texas Instruments", Copyright="Copyright (C) 2026 Ultra Librarian. All rights reserved.", Manufacturer_Part_Number=DRV8251ADDAR, RefDes=RefDes, Type=Type
U203: "IC MOTOR DRIVER PAR 16HTSSOP", Case/Package=HTSSOP, Max Operating Temperature=85°C, Max Output Current=2A, Max Supply Voltage=10.8V, Min Operating Temperature=-40°C, Min Supply Voltage=2.7V, Nominal Supply Current=3mA, Output Current=1.5A, Package Quantity=2000, Fault Protection="Over Temperature", Interface=PWM, Lead Free="Lead Free", Number Of Outputs=2, Number of Pins=16, Output Current per Channel=1.5A, Packaging="Tape and Reel", Radiation Hardening=No, REACH SVHC="No SVHC", RMS Current (Irms)=1.5A, RoHS Compliant=Yes, Series=DRV8833, Supply Current=3mA, Technology=NMOS
U301: "Accelerometer, Gyroscope, 6 Axis Sensor Output", Package=None, Availability=Unavailable, MP=ICM-42688-P, Price=None
U302: "High-accuracy, ultra-low-power, 3-axis digital output magnetometer", Case/Package=LGA, Max Operating Temperature=85°C, Min Operating Temperature=-40°C, Axis="X, Y, Z", Number of Pins=12, Output Type=SPI, Packaging="Cut Tape", Resolution=16b, RoHS Compliant=Yes, Sensing Method=Magnetoresistive
X101: library part TSX-3225_24.0000MF15X-AC, "Crystal SMD 24MHz 10PPM 7pF 3225", Manufacturer=Epson, Manufacturer Part Number="TSX-3225 24.0000MF15X-AC"

## Free pads (board coordinates)
  round 1 hole 3.2: MH(3,3) MH(3,79) MH(69.5,3) MH(69.5,79)

## Via types
v1: diameter 0.7, hole 0.3, TOP_Layer to BOTTOM_Layer, 73 vias
v2: diameter 0.9, hole 0.5, TOP_Layer to BOTTOM_Layer, 38 vias
v3: diameter 0.6, hole 0.3, TOP_Layer to BOTTOM_Layer, 32 vias
v4: diameter 1, hole 0.6, TOP_Layer to BOTTOM_Layer, 1 vias
v5: diameter 0.5, hole 0.3, TOP_Layer to BOTTOM_Layer, 1 vias

## Nets (pads, with @x,y where several pads share a name; then routed paths per layer and width w, separated by ;. In a path a pad name is that pad's centre, name@x,y a point inside that pad or via, vN(x,y) a via of type N, cw(c..) or ccw(c..) an arc to the next point about the centre after c; other vN are vias at no path point)
+3V3: C110.2 C111.2 C112.2 C113.2 C114.2 C115.2 C119.2 C301.2 C302.2 C303.2 C304.2 C305.2 C306.1 FB102.2 J102.2 J103.2 J104.2 J105.2 R1.2 R105.2 R301.2 R302.2 R303.2 S101.1 U103.1 U103.19 U103.32 U103.48 U103.64 U301.5 U301.8 U302.3 U302.9 U302.10 | length 249.7
  TOP_Layer w0.2: U302.3@24.56,57.614 25.486,57.614 25.75,57.35 v1(30.2,57.35)
  TOP_Layer w0.25: 22.425,56.625 22.436,56.614 U302.10@23.035,56.614 U302.9@23.035,57.114 ; v3(24.325,46.5) 24.42,46.5 24.677,46.243 C110.2@25.65,46.243 ; 25.25,26.925 25.259,26.934 U301.5@25.259,27.538 ; 26.45,46.175 26.453,46.172 U103.1@27.639,46.172 ; U301.8@26.924,27.703 27.722,27.703 27.725,27.7 ; R301.2@27.387,30.725 28.725,30.725 29.2,31.2 v1(29.275,31.2) ; 29.125,49.2 29.125,49.086 29.53,48.681 U103.64@29.53,48.063 ; v3(29.5,33.75) 30.037,34.287 30.037,34.705 C111.2@30.182,34.85 30.53,35.198 U103.19@30.53,36.781 ; U103.32@37.03,36.781 37.519,36.781 38.15,36.15 38.15,35.525 ; U103.48@38.921,46.172 39.539,46.172 39.917,46.55 40.15,46.55
  TOP_Layer w0.3: v1(13.087,16.057) 13.087,16.775 R105.2@13.65,17.338 ; C305.2@20.075,56.718 C304.2@21.475,56.718 21.568,56.625 22.425,56.625 ; v1(24.175,25.35) 24.252,25.427 24.625,25.427 25.343,26.145 C303.2@25.343,26.175 25.25,26.268 25.25,26.925 ; R303.2@26.175,55.538 R303.2@26.188,55.538 ; R302.2@26.175,59.162 26.175,59.675 v1(27.025,60.525) ; 26.2,46.175 26.45,46.175 ; 27.725,27.7 28.232,27.7 C301.2@28.275,27.743 ; C115.2@28.27,51.65 28.27,53.443 26.275,55.438 26.275,55.451 R303.2@26.188,55.538 ; v1(28.575,54.95) 27.987,55.538 R303.2@26.188,55.538 ; 29.125,49.2 29.125,49.425 ; 38.15,35.525 38.15,34.882 C112.2@38.182,34.85 38.182,34.82 38.85,34.152 38.85,32.933 38.4,32.483 v1(38.4,32.375) ; 40.15,46.55 40.4,46.55
  TOP_Layer w0.4: R1.2@10.5,13.588 12.338,13.588 13.087,14.337 v1(13.087,16.057) ; v1(18.175,55.325) C306.1@18.175,57.05 18.437,56.788 20.005,56.788 C305.2@20.075,56.718 ; C110.2@25.65,46.243 25.718,46.175 26.2,46.175 ; C115.2@28.27,51.65 28.275,51.645 28.275,50.923 29.118,50.08 C114.2@29.118,50.05 29.125,50.043 29.125,49.425 ; C301.2@28.275,27.743 28.301,27.769 29.949,27.769 C302.2@29.975,27.795 30.005,27.795 30.793,27.007 31.493,27.007 v1(31.55,26.95) ; v1(30.275,19.375) 31.065,18.585 S101.1@31.065,17.393 ; 40.4,46.55 40.818,46.55 C113.2@40.85,46.582 40.88,46.582 41.048,46.75 41.05,46.75 41.85,47.55 v1(41.85,47.6)
  TOP_Layer w0.5: v1(17.425,40.525) 17.479,40.525 18.184,41.23 C119.2@19.975,41.23 20.002,41.203 21.948,41.203 FB102.2@21.975,41.176 ; v1(27.025,60.525) 29.475,60.525 30.2,59.8 v1(30.2,57.35)
  TOP_Layer w1.4: J102.2@27.55,75.48 J105.2@32.05,75.48 J104.2@36.55,75.48 J103.2@41.05,75.48
  INT2_GND w0.3: v1(30.2,57.35) v1@30.25,57.35
  INT2_GND w0.4: v1(17.425,40.525) 17.425,44.225 18.6,45.4 24.05,45.4 24.306,45.656 24.306,46.481 v3(24.325,46.5) 19.275,46.5 18.175,47.6 v1(18.175,55.325) ; v1(29.275,31.2) 29.275,33.471 29.5,33.696 v3(29.5,33.75) ; v1(30.275,19.375) 30.275,25.675 v1(31.55,26.95)
  INT2_GND w0.5: v1(18.175,55.325) 18.175,59.775 20.975,62.575 24.975,62.575 v1(27.025,60.525) ; v1@30.25,57.35 39.35,57.35 41.825,54.875 41.825,47.625 v1(41.85,47.6) 38.4,44.15 v1(38.4,32.375)
  INT2_GND w0.8: v1(27.025,60.525) 27.025,64.175 28.25,65.4 40.975,65.4 42.75,67.175 42.75,73.78 J103.2@41.05,75.48
  BOTTOM_Layer w0.3: v1(24.175,25.35) 24.283,25.35 24.783,24.85 30.675,24.85 31.55,25.725 v1(31.55,26.95) ; v1(28.575,54.95) 28.575,54.975 30.15,56.55 30.15,57.3 v1(30.2,57.35)
  BOTTOM_Layer w0.4: v1(13.087,16.057) 15.605,18.575 29.475,18.575 v1(30.275,19.375) ; v1(31.55,26.95) 29.275,29.225 v1(29.275,31.2) 32.85,31.2 34.475,32.825 37.869,32.825 38.319,32.375 v1(38.4,32.375)
+3V3_ADC: C117.2 C118.2 FB102.1 U103.13 | length 6
  TOP_Layer w0.25: C117.2@25.505,39.588 C117.2@25.575,39.518 25.593,39.5 26.211,39.5 26.882,40.172 U103.13@27.639,40.172
  TOP_Layer w0.4: FB102.1@21.975,39.724 22.002,39.697 23.948,39.697 C118.2@23.975,39.67 24.057,39.588 C117.2@25.505,39.588
+3V3_DEBUG: J104.1 J106.1 | length 10.4
  INT2_GND w1.4: J104.1@36.55,78.02 J104.1@36.55,78.02 37.781,78.019 38.8,77 38.8,73 40.36,71.44 J106.1@40.36,69.9
+3V3_EXT: C109.1 J102.1 J201.2 J202.2 R203.2 U102.2 U102.4 U201.4 U202.4 | length 166.9
  TOP_Layer w0.35: v1(49.2,49.925) 49.295,49.925 49.715,50.345 U201.4@51.476,50.345
  TOP_Layer w0.4: v1(49.4,31.7) 50.163,32.463 U202.4@51.454,32.463 ; v1(58.3,10.475) 58.8,10.975 R203.2@58.8,11.763
  TOP_Layer w1.4: U102.4@19.75,78.25 19.878,78.122 27.448,78.122 J102.1@27.55,78.02
  INT2_GND w0.5: v1(58.3,10.475) 58.3,18.05 56.425,19.925 52.375,19.925 49.4,22.9 v1(49.4,31.7) 47.175,33.925 47.175,44.725 49.2,46.75 v1(49.2,49.925) 67.925,49.925 J201.2@69.3,48.55 66.925,46.175 66.925,32.425 J202.2@69.3,30.05
  INT2_GND w0.7: J102.1@27.55,78.02 30.58,81.05 54.725,81.05 55.625,80.15 55.625,67.925 47.15,59.45 47.15,51.975 v1(49.2,49.925)
+3V3_RPI: J2.1 J105.1 | length 40.3
  INT2_GND w1.4: J2.1@5.625,55.45 12.6,62.425 12.6,67.6 17.9,72.9 28.5,72.9 29.8,74.2 29.8,76.802 31.017,78.019 32.048,78.019 J105.1@32.049,78.02
+3V3_USB: C104.1 J103.1 U101.2 U101.4 | length 25.3
  TOP_Layer w1: J103.1@41.05,78.02 41.05,80.05 42.1,81.1 58.572,81.1 61.972,77.7 U101.4@62.5,77.7
+5V_EXT: C108.1 J1.3 J401.1 J402.1 J403.1 J404.1 U102.3 | length 65.9
  TOP_Layer w0.9: J401.1@4.65,23.25 J402.1@4.65,30.25 J404.1@4.65,37.275 J403.1@4.65,44.775 4.4,45.025 4.4,45.4 3.2,46.6 3.2,64.9 4.51,66.21 J1.3@7,66.21
  TOP_Layer w1.4: J1.3@7,66.21 20.91,66.21 v1(23.7,69) 23.7,69.5 v1(23,70.2)
  other v1: 22.3,69
+5V_USB: C102.2 C103.1 FB101.2 U101.3
+5V_VBUS: C101.2 D101.5 FB101.1 J101.A4B9 J101.B4A9 | length 26.7
  BOTTOM_Layer w1.2: v1(48.8,77.05) 48.825,77.075 v1(50.05,77.075) 51.3,75.825 51.3,71.925 49.4,70.025 v4(49.4,67.2)
  BOTTOM_Layer w1.4: v4(49.4,67.2) 51.5,67.2 56.3,62.4 v2(60,62.4) v2(60,64.1)
+6V_EXT: C205.1 C206.2 C207.2 J1.2 U203.12 | length 117.6
  INT2_GND w1.8: J1.2@7,70.17 6.828,69.998 3.898,69.998 2.1,68.2 2.1,9.5 10.05,1.55 35.55,1.55 43.4,9.4 v2(43.4,14.7)
  other v2: 42.1,15.475 43.2,16.325
+12V_EXT: C201.1 C202.2 C203.1 C204.2 J1.1 U201.5 U202.5
  other v2: 59.4,23 61.7,23 59.4,26.5 61.7,26.5 59.2,41 61.5,41 59.2,44.5 61.5,44.5
BM_MCU_SCL: J3.1 U103.28 | length 38.8
  TOP_Layer w0.2: v3(33.575,39.175) 35.02,37.73 35.02,36.791 U103.28@35.03,36.781
  INT2_GND w0.3: J3.1@29.75,5 32.775,8.025 32.775,37.425 33.575,38.225 v3(33.575,39.175)
BM_MCU_SDA: J3.2 U103.29 | length 37.2
  TOP_Layer w0.2: v3(35.425,38.8) 35.425,38.705 35.53,38.6 U103.29@35.53,36.781
  INT2_GND w0.3: J3.2@32.25,5 33.775,6.525 33.775,37.15 v3(35.425,38.8)
DRV_VINT: C208.2 U203.14 | length 6
  TOP_Layer w0.3: 46.25,14.1 46.757,14.607 U203.14@51.028,14.607
  TOP_Layer w0.4: C208.2@45.5,13.38 45.53,13.38 46.25,14.1
ESD_USB_D_N: D101.1 J101.A7 J101.B7 | length 5.4
  TOP_Layer w0.281: J101.A7@49.15,74.575 49.15,73.625 49.35,73.425 49.95,73.425 50.141,73.616 ; J101.B7@50.15,74.575 50.15,73.55 50.425,73.275 50.425,71.53 D101.1@50.35,71.455
ESD_USB_D_P: D101.3 J101.A6 J101.B6 | length 6.2
  TOP_Layer w0.281: D101.3@48.45,71.455 48.375,71.53 48.375,73.1 48.65,73.375 48.65,74.575 48.65,75.45 48.875,75.675 49.425,75.675 49.65,75.45 J101.A6@49.65,74.575